# Altium PCB 3043-1-1552.PcbDoc
Units mm, origin at the board's own origin, x right, y up, seen from the top; angles counter-clockwise.
Board outline 79.04 x 44.02 mm, 2 copper layers (Top Layer, Bottom Layer); 59 components, 48 nets, 203 pads, 48 vias.
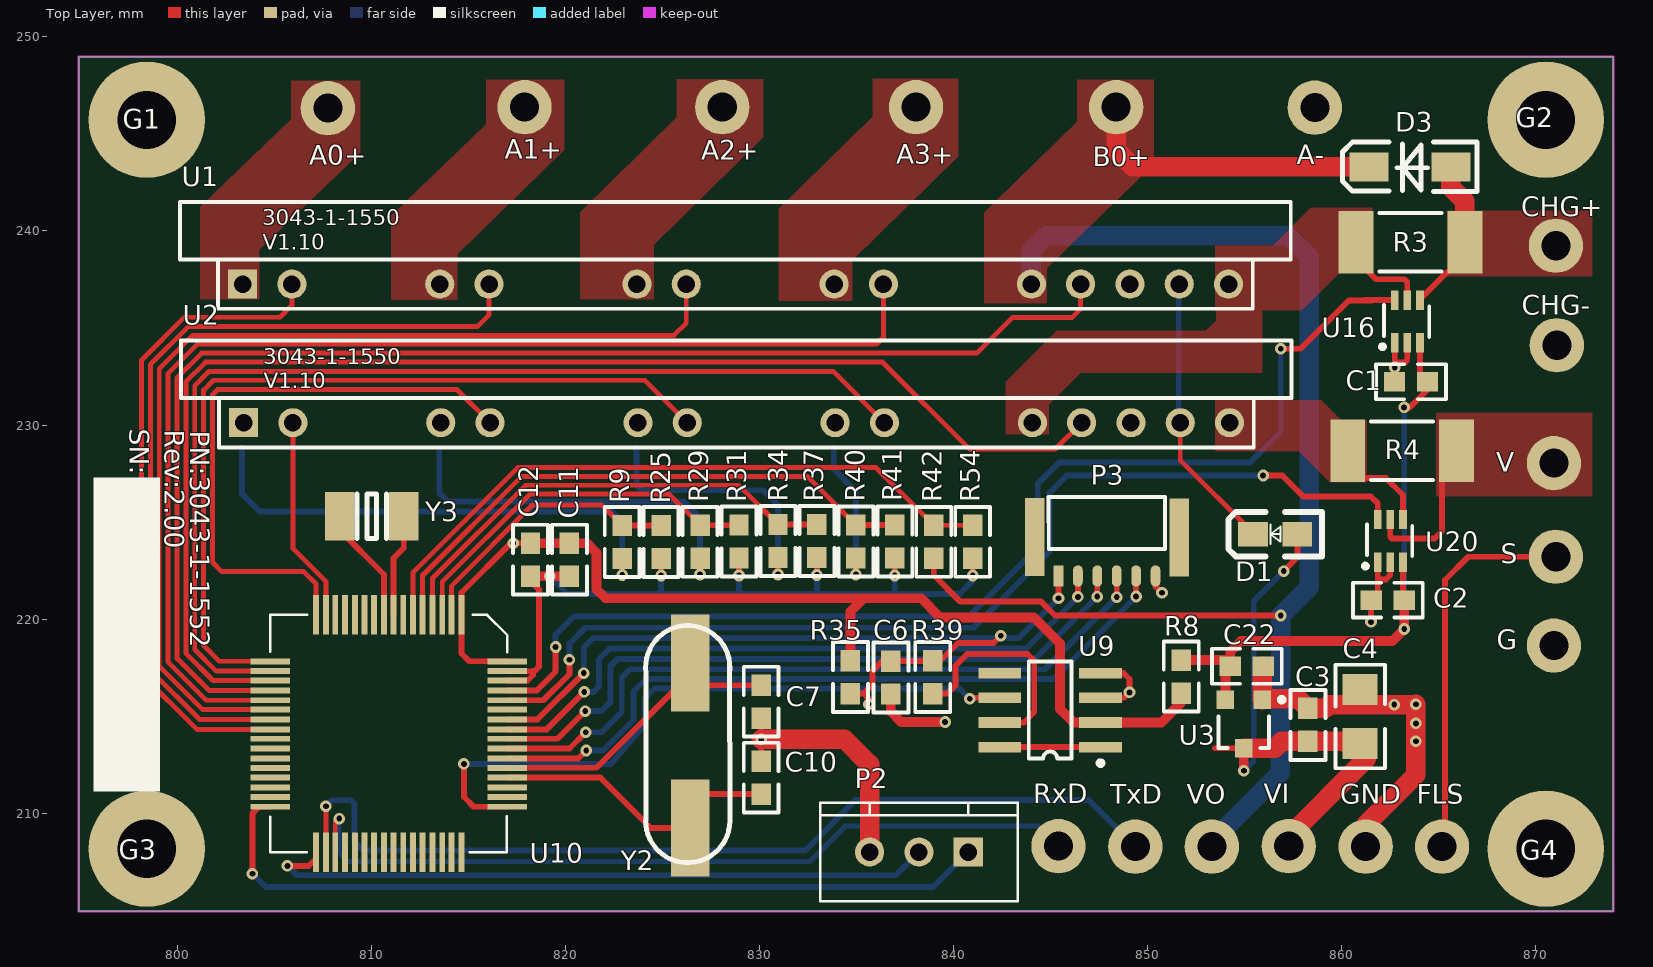
[diagram p0: Top Layer view]
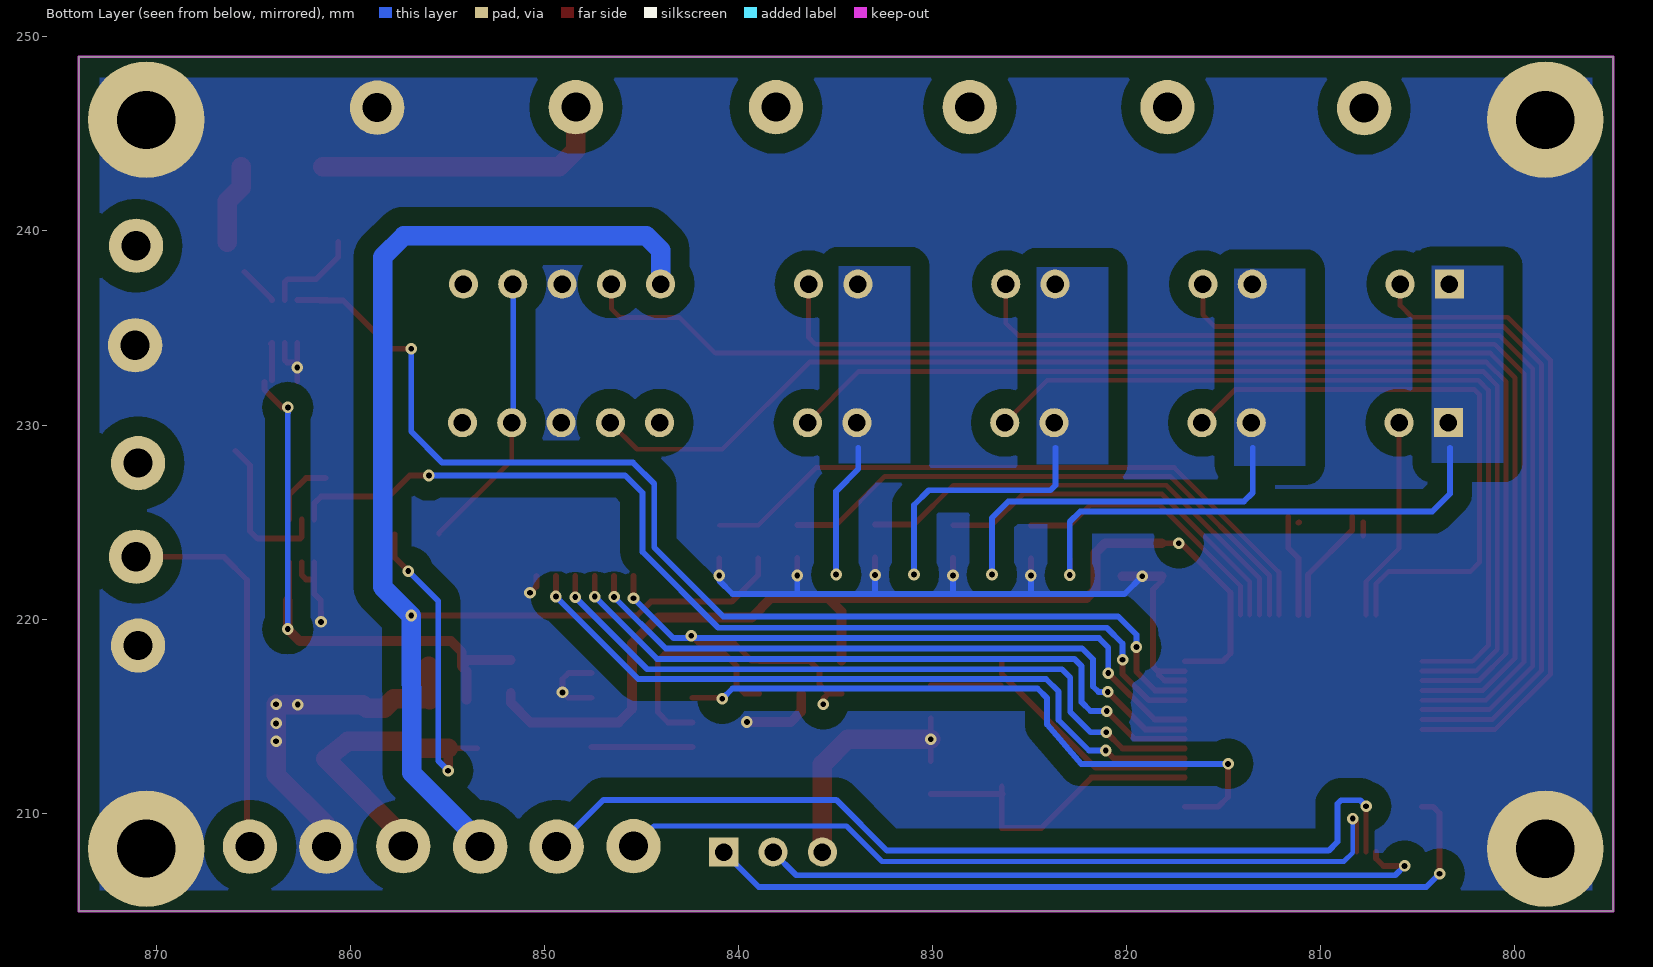
[diagram p1: Bottom Layer view, seen from below]

## Layer stack, top to bottom
Top Layer: signal copper 0.0356
Dielectric: core 0.32, FR-4, Dk 4.8
Bottom Layer: signal copper 0.0356

## Board outline
794.944,204.953 873.989,204.953 873.989,248.971 794.944,248.971

## Design rules (kind name [scope] priority, off if disabled: settings)
Clearance [All] p1: gap=0.1
ComponentClearance [All] p1: gap=0 collisioncheckmode=2
HoleSize [All] p1: absolutevalues=TRUE maxlimit=10 minlimit=0.025 maxpercent=80.000 minpercent=20.000
PolygonConnect [All] p1: connectstyle=Direct reliefconductorwidth=0.254 reliefentries=4 polygonreliefangle="90 Angle"
RoutingVias [All] p1: holewidth=0.711 width=1.27 viastyle="Through Hole" minholewidth=0.711 minwidth=1.27 maxholewidth=0.711 maxwidth=1.27
SolderMaskExpansion [All] p1: expansion=0.102
TestPointUsage [All] p1: valid=0 allowmultiple=FALSE
Testpoint [All] p1: side=15 testpointundercomponent=TRUE minsize=1.016 maxsize=2.54 preferedsize=1.524 minholesize=0 maxholesize=1.016 preferedholesize=0.813 testpointgrid=0.025 style=1023 order=-539222988
Width [All] p1: maxlimit=10 minlimit=0.1 preferedwidth=0.254 toplayer_prefwidth=1 bottomlayer_prefwidth=1 minimp=50.000000 maximp=50.000000 favimp=50.000000
16 further rules are at their usual default settings.

## Classes and differential pairs
component class U_2-Charge&Discharge: A0+ A1+ A2+ A3+ A- B0+ C1 C2 CHG+ CHG- D3 G R3 R4 S SEN U1 U2 U16 U20 V
component class U_1-Power: 5V -5V BAT C3 C4 C22 D1 DS1 G1 G2 G3 G4 J1 J2 J3 J4 NC R8 R46 R94 R95 R96 R97 R98 R99 R100 R101 R102 TP11 U3 U32 U63 U64 U65 U66 U67 U68 U69 VIN VMNG VOUT
component class U_5-ADC: R9 R25 R29 R31 R34 R37 R40 R41 R42 R54

## Components (designator, comment, footprint, x,y, rotation, side; value= is the part's Value field where it differs from the comment)
A0+ "ND" END_1.5_2.8 807.771,246.329 r0 top
A1+ "ND" END_1.5_2.8 817.905,246.38 r0 top
A2+ "ND" END_1.5_2.8 828.091,246.38 r0 top
A3+ "ND" END_1.5_2.8 838.073,246.38 r0 top
A- "ND" END_1.5_2.8 858.622,246.355 r0 top
B0+ "ND" END_1.5_2.8 848.385,246.38 r0 top (schematic designator B+)
C1 "100nF_20%_0603" C1608-0603 863.575,232.232 r0 top
C2 "100nF_20%_0603" C1608-0603 862.381,220.98 r0 top
C3 "4.7uF_20%_0603" C1608-0603 858.266,214.554 r90 top
C4 "4.7uF_20%_0603" CC3216-1206 860.958,216.129 r90 top
C6 "100nF_20%_0603" C1608-0603 836.778,216.992 r270 top
C7 "22pF_20%_0603" C1608-0603 830.097,215.748 r90 top
C10 "22pF_20%_0603" C1608-0603 830.097,211.836 r270 top
C11 "100nF_20%_0603" C1608-0603 820.217,223.063 r270 top
C12 "100nF_20%_0603" C1608-0603 818.21,223.063 r270 top
C22 "4.7uF_20%_0603" C1608-0603 855.116,217.576 r0 top
CHG+ "ND" END_1.5_2.8 871.042,239.243 r0 top
CHG- "ND" END_1.5_2.8 871.093,234.112 r0 top
D1 "SS14" LED0805 856.463,224.384 r0 top
D3 "SS14" DO-214AB_SS14 866.724,242.037 r180 top
FLS "ND" END_1.5_2.8 865.175,208.28 r0 top
G "ND" END_1.5_2.8 870.941,218.643 r90 top
G1 "ND" END_3_6 798.441,245.724 r0 top
G2 "ND" END_3_6 870.517,245.724 r0 top
G3 "ND" END_3_6 798.441,208.174 r0 top
G4 "ND" END_3_6 870.517,208.18 r0 top
GND "ND" END_1.5_2.8 861.238,208.28 r0 top
P2 "Header 3" XH-03H 840.765,208.001 r180 top
P3 "Header 6" SH-06S 845.439,222.25 r0 top
R3 "25mR_1%_3225" CR6332-2512 863.549,239.42 r180 top
R4 "25mR_1%_3225" CR6332-2512 863.117,228.676 r180 top
R8 "0R_1%_0603" C1608-0603 851.738,217.043 r90 top
R9 "1K_5%_0603" C1608-0603 822.935,223.977 r90 top
R25 "1K_5%_0603" C1608-0603 824.941,223.977 r90 top
R29 "1K_5%_0603" C1608-0603 826.948,223.989 r90 top
R31 "1K_5%_0603" C1608-0603 828.954,224.003 r90 top
R34 "1K_5%_0603" C1608-0603 830.961,224.028 r90 top
R35 "10K _5%_0603" C1608-0603 834.695,217.018 r90 top
R37 "1K_5%_0603" C1608-0603 832.968,224.028 r90 top
R39 "0R _5%_0603" C1608-0603 838.937,217.018 r90 top
R40 "1K_5%_0603" C1608-0603 834.974,224.003 r90 top
R41 "1K_5%_0603" C1608-0603 836.981,224.003 r90 top
R42 "1K_5%_0603" C1608-0603 838.987,223.989 r90 top
R54 "1K_5%_0603" C1608-0603 840.994,223.989 r90 top
RxD "ND" END_1.5_2.8 845.414,208.305 r0 top
S "ND" END_1.5_2.8 871.042,223.215 r90 top
TxD "ND" END_1.5_2.8 849.376,208.28 r0 top
U1 "3043-1-1550" 3043-1-1550_V1.10 823.646,237.287 r0 top
U2 "3043-1-1550" 3043-1-1550_V1.10 823.697,230.149 r0 top
U3 "XC6206" SO-G3/C2.5 854.913,213.69 r180 top
U9 "MAX706S" SO-8 844.982,215.316 r90 top
U10 "MSP430F149/249/449" QFP-64 816.991,207.975 r180 top
U16 "INA213" SC70-6 862.736,234.239 r90 top
U20 "INA213" SC70-6 861.859,222.936 r90 top
V "ND" END_1.5_2.8 870.941,228.041 r180 top
VI "ND" END_1.5_2.8 857.275,208.305 r0 top
VO "ND" END_1.5_2.8 853.313,208.28 r0 top
Y2 "8MHz_SMD" XTAL-P4mm_SMD 825.678,212.039 r90 top
Y3 "32.768kHz_SMD" XTAL-3216 811.682,225.298 r180 top

## Footprints (in the part's own frame and the unit in brackets; to place one, negate y for a bottom-side part, rotate by r counter-clockwise, add the part's x,y. Pads: shape width x height; smd on the part's side, far side on the other; paste and mask are expansions set on the pad)
3043-1-1550_V1.10 [mm]
  rect 1.5x1.5 hole 0.9: 1(-20.269,-0.025)
  round 1.5 hole 0.9: 2(-17.729,-0.025) 5(-10.109,-0.025) 6(-7.569,-0.025) 9(0.051,-0.025) 10(2.591,-0.025) 13(10.211,-0.025) 14(12.751,-0.025) 17(20.371,-0.025) 18(22.911,-0.025) 19(25.451,-0.025) 20(27.991,-0.025) 21(30.531,-0.025)
  silkscreen extent -23.49,-1.3 33.73,4.22
C1608-0603 [mm] "Chip Resistor; Body 1.6 x 0.8 mm (LxW typ)"
  rect 1.1x1 smd: 1(-0.85,0) 2(0.85,0)
  silkscreen extent -1.8,-0.9 1.8,0.9
CC3216-1206 [mm]
  rect 1.6x1.8 smd: 1(-2.54,0) 2(0.26,0)
  silkscreen extent -3.81,-1.27 1.52,1.27
CR6332-2512 [mm] "Chip Resistor; Body 6.3 x 3.2 mm (LxW typ)"
  rect 1.8x3.2 smd: 1(-2.8,0) 2(2.8,0)
  silkscreen extent -1.6,-1.5 1.6,1.5
DO-214AB_SS14 [mm]
  rect 2x1.5 smd: 1(1.092,-1.27) 2(5.309,-1.27)
  silkscreen extent -0.25,-2.54 6.68,0
END_1.5_2.8 [mm]
  round 2.8 hole 1.5: 1(0,0)
END_3_6 [mm]
  round 6 hole 3: 1(0,0)
LED0805 [mil]
  rect 60x50 smd: 1(49.55,-0.2) 2(-40.45,-0.2)
  silkscreen extent -90,-45 100,45
QFP-64 [mil]
  rect 12x80 smd: 1(92,-482) 2(112,-482) 3(131,-482) 4(151,-482) 5(171,-482) 6(190,-482) 7(210,-482) 8(230,-482) 9(249,-482) 10(269,-482) 11(289,-482) 12(308,-482) 13(328,-482) 14(348,-482) 15(367,-482) 16(387,-482) 33(387,-1) 34(367,-1) 35(348,-1) 36(328,-1) 37(308,-1) 38(289,-1) 39(269,-1) 40(249,-1) 41(230,-1) 42(210,-1) 43(190,-1) 44(171,-1) 45(151,-1) 46(131,-1) 47(112,-1) 48(92,-1)
  rect 80x12 smd: 17(480,-388) 18(480,-368) 19(480,-349) 20(480,-329) 21(480,-309) 22(480,-290) 23(480,-270) 24(480,-250) 25(480,-231) 26(480,-211) 27(480,-191) 28(480,-172) 29(480,-152) 30(480,-132) 31(480,-113) 32(480,-93) 49(-1,-93) 50(-1,-113) 51(-1,-132) 52(-1,-152) 53(-1,-172) 54(-1,-191) 55(-1,-211) 56(-1,-231) 57(-1,-250) 58(-1,-270) 59(-1,-290) 60(-1,-309) 61(-1,-329) 62(-1,-349) 63(-1,-368) 64(-1,-388)
  silkscreen extent -1,-482 480,-1
SC70-6 [mm]
  rect 1x0.4 smd: 1(0,0) 2(0,-0.65) 3(0,-1.3) 4(2.2,-1.3) 5(2.2,-0.65) 6(2.2,0)
  silkscreen extent -0.3,-1.78 1.96,0.73
SH-06S [mm]
  rect 1x4 smd: 0(-1.245,1.981) 0(6.198,1.956)
  rect 0.5x1.1 smd: 1(-0.025,-0.025)
  oval 0.5x1.1 smd: 2(0.975,-0.025) 3(1.975,-0.025) 4(2.975,-0.025) 5(3.975,-0.025) 6(4.975,-0.025)
  silkscreen extent -0.53,1.36 5.47,4.04
SO-8 [mm] "Plastic Small Outline; 8 Leads; Body Width 3.9 mm"
  rect 0.55x2.2 smd: 1(-1.905,-2.6) 2(-0.635,-2.6) 3(0.635,-2.6) 4(1.905,-2.6) 5(1.905,2.6) 6(0.635,2.6) 7(-0.635,2.6) 8(-1.905,2.6)
  silkscreen extent -2.85,-2.72 2.5,1.1
SO-G3/C2.5 [mm] "SOT-23; 3 Leads; Body 3.0 x 2.6 mm, inc. leads (LxW max)"
  rect 0.9x0.95 smd: 1(-1.001,-2.164) 2(0.899,-2.164) 3(-0.051,0.336)
  silkscreen extent -2.13,-2.29 1.25,0.34
XH-03H [mm] "XH Serial,2.54mm pitch"
  rect 1.5x1.5 hole 0.9: 1(0,0)
  round 1.5 hole 0.9: 2(2.54,0) 3(5.08,0)
  silkscreen extent -2.54,-2.54 7.62,2.54
XTAL-3216 [mil] "XTAL SMD type, body=1.5x3.2mm"
  rect 60x98.43 smd: 1(0,0) 2(130,0)
  silkscreen extent 35,-45 95,45
XTAL-P4mm_SMD [mm] "XTAL,Pitch 4mm,SMD"
  rect 5x2 smd: 1(-2.794,-0.762) 2(5.715,-0.762)
  silkscreen extent -4.58,-2.81 7.63,1.54

## Part data
C1 C2 C3 C4 C6 C7 C10 C11 C12 C22: library part Cap2, "Capacitor"
D1: library part "D Schottky", "Schottky Diode"
D3: library part "D Tunnel1", "Tunnel Diode - RLC Model"
P2: "Header, 3-Pin"
P3: library part "Header 3X2", "Header, 3-Pin, Dual row"
R3 R4 R8 R9 R25 R29 R31 R34 R35 R37 R39 R40 R41 R42 R54: library part Res3, "Resistor"
U9: library part PCF8574T
U10: library part STC15F2K60S2_QFP44
Y2 Y3: library part XTAL, "Crystal Oscillator"

## Via types
v1: diameter 0.6, hole 0.3, Top Layer to Bottom Layer, 48 vias

## Nets (pads, with @x,y where several pads share a name; then routed paths per layer and width w, separated by ;. In a path a pad name is that pad's centre, name@x,y a point inside that pad or via, vN(x,y) a via of type N, cw(c..) or ccw(c..) an arc to the next point about the centre after c; other vN are vias at no path point)
A_VB0: R9.2 R25.2 U10.2 | length 14.5
  Top Layer w0.25: U10.2 814.146,221.717 818.312,225.882 821.88,225.882 R9.2
  Top Layer w0.3: R9.2 R25.2
A_VB1: R29.2 R31.2 U10.3 | length 19.5
  Top Layer w0.25: U10.3 813.664,221.92 818.185,226.441 825.346,226.441 R29.2
  Top Layer w0.3: R29.2 R31.2@828.941,224.839
A_VB2: R34.2 R37.2 U10.4 | length 24.5
  Top Layer w0.25: U10.4 813.156,222.098 817.956,226.898 828.941,226.898 R34.2
  Top Layer w0.3: R34.2 R37.2
A_VB3: R40.2 R41.2 U10.5 | length 29.5
  Top Layer w0.25: U10.5 812.648,222.25 817.753,227.355 832.471,227.355 R40.2
  Top Layer w0.3: R40.2 R41.2
A_VBAK: R42.2 R54.2 U10.6 | length 34.5
  Top Layer w0.25: U10.6 812.165,222.428 817.55,227.813 836.014,227.813 R42.2 R54.2
A_VCHG: U10.61 U16.6 | length 60
  Top Layer w0.3: U10.61 818.54,216.332 819.506,217.297 v1(819.506,218.567) ; v1(856.869,233.934) 857.885,233.934 860.374,236.423 861.568,236.423 ; 861.187,236.449 861.568,236.446 U16.6
  Bottom Layer w0.3: v1(819.506,218.567) 819.506,219.202 820.445,220.142 840.791,220.142 844.347,223.698 844.347,226.974 845.439,228.067 855.269,228.067 856.869,229.667 v1(856.869,233.934)
A_VDIS: U10.60 U20.6 | length 53.8
  Top Layer w0.3: U10.60 818.871,215.824 820.217,217.17 v1(820.217,217.907) ; v1(855.955,227.406) 856.945,227.406 858.037,226.314 861.517,226.314 861.859,225.972 U20.6
  Bottom Layer w0.3: v1(820.217,217.907) 820.217,218.745 821.03,219.558 841.045,219.558 844.956,223.469 844.956,226.517 845.845,227.406 v1(855.955,227.406)
CHG_0: U1.2 U10.24 | length 34
  Top Layer w0.25: U10.24 801.014,214.325 798.17,217.17 798.17,233.35 800.379,235.56 805.307,235.56 805.917,236.169 U1.2
CHG_1: U1.6 U10.23 | length 43.1
  Top Layer w0.25: U10.23 801.167,214.833 798.627,217.373 798.627,233.121 800.583,235.077 815.467,235.077 816.077,235.687 U1.6
CHG_2: U1.10 U10.22 | length 52.1
  Top Layer w0.25: U10.22 801.319,215.341 799.084,217.576 799.084,232.893 800.811,234.62 825.602,234.62 826.237,235.255 U1.10
CHG_3: U1.14 U10.21 | length 61.3
  Top Layer w0.25: U10.21 801.497,215.824 799.541,217.78 799.541,232.664 801.04,234.163 836.041,234.163 836.397,234.518 U1.14
CHG_4: U1.18 U10.20 | length 69.2
  Top Layer w0.25: U10.20 801.649,216.332 799.998,217.983 799.998,232.435 801.268,233.705 841.206,233.705 843.051,235.551 846.116,235.551 846.557,235.991 U1.18
DCHG_0: U2.2 U10.15 | length 10.6
  Top Layer w0.25: U2.2 805.967,223.647 807.669,221.945 U10.15
DCHG_1: U2.6 U10.16 | length 31.1
  Top Layer w0.25: U10.16 807.161,221.817 806.525,222.453 802.31,222.453 801.827,222.936 801.827,231.572 802.089,231.833 814.418,231.833 U2.6
DCHG_2: U2.10 U10.17 | length 43
  Top Layer w0.25: U10.17 802.183,217.83 801.37,218.643 801.37,231.8 801.878,232.308 824.103,232.308 U2.10
DCHG_3: U2.14 U10.18 | length 54.9
  Top Layer w0.25: U10.18 802.03,217.322 800.913,218.44 800.913,232.029 801.649,232.766 833.806,232.766 U2.14
DCHG_4: U2.18 U10.19 | length 67.9
  Top Layer w0.25: U10.19 801.853,216.84 800.456,218.237 800.456,232.232 801.472,233.248 836.346,233.248 840.842,228.752 845.236,228.752 U2.18
FLS: FLS.1 S.1 | length 20
  Top Layer w0.3: FLS.1 865.327,208.432 865.327,222.021 866.521,223.215 S.1
GND: A-.1 C1.1 C2.1 C3.2 C4.2 C6.2 C7.1 C10.1 C11.2 C12.2 C22.2 CHG-.1 G1.1 G2.1 G3.1 G4.1 G.1 GND.1 P2.3 P3.6 R25.1 R31.1 R37.1 R41.1 R54.1 U1.19 U2.19 U3.1 U9.3 U9.4 U10.62 U10.63 U16.1 U16.2 U20.1 U20.2 | length 89.2
  Top Layer w0.3: U10.62 818.058,216.84 818.337,217.119 818.337,217.348 818.439,217.348 818.642,217.551 818.642,221.539 818.21,221.971 C12.2 ; U10.63 818.312,217.322 818.337,217.332 818.342,217.334 818.377,217.348 ; v1@819.048,222.326 v1@819.099,222.377 ; v1(824.941,222.25) R25.1 ; v1(828.954,222.25) R31.1 ; C10.1 C7.1 ; v1(832.968,222.275) R37.1 ; v1(836.981,222.25) R41.1 ; v1(840.994,222.25) R54.1 ; U9.3 848.792,215.951 v1(849.071,216.23) 849.071,216.916 848.766,217.221 U9.4 ; P3.6 850.414,221.691 v1(850.744,221.361) ; v1(861.517,219.862) C2.1 861.859,221.308 U20.1 ; 861.873,222.047 862.279,222.047 862.509,222.277 U20.2 ; C1.1@862.736,232.269 U16.1 ; v1@862.736,233.223 863.27,233.223 863.386,233.339 U16.2
  Top Layer w0.5: C12.2 C11.2 ; C6.2 836.778,215.24 837.311,214.706 v1(839.572,214.706) ; U3.1 U3.1@855.966,215.855
  Top Layer w1: v1(830.097,213.817) 834.39,213.817 835.685,212.522 P2.3 ; U3.1 855.914,217.524 C22.2 ; U3.1@855.966,215.907 857.763,215.907 C3.2 859.167,215.404 859.364,215.601 v1@863.555,215.601 ; GND.1 861.238,209.398 863.829,211.988 v1(863.829,215.621)
  Bottom Layer w0.3: v1(819.201,222.213) 820.112,221.302 840.31,221.302 840.994,221.985 v1(840.994,222.25) ; 824.941,221.302 v1(824.941,222.25) ; 828.954,221.353 v1(828.954,222.25) ; 832.968,221.302 v1(832.968,222.275) ; 836.981,221.353 v1(836.981,222.25)
  other v1: 863.829,213.716 863.829,214.63 862.711,215.601 862.736,232.969
MCU_RXD: P2.2 U10.33 | length 35.2
  Top Layer w0.3: v1(805.688,207.289) 806.78,207.289 807.161,207.67 U10.33
  Bottom Layer w0.3: v1(805.688,207.289) 806.171,206.807 837.032,206.807 P2.2
MCU_RXD2_2: RxD.1 U10.35 | length 42
  Top Layer w0.25: U10.35 808.152,209.55 v1(808.355,209.728)
  Bottom Layer w0.25: v1(808.355,209.728) 808.355,207.975 808.812,207.518 832.612,207.518 834.441,209.347 844.372,209.347 RxD.1
MCU_TXD: P2.1 U10.32 | length 42.1
  Top Layer w0.3: v1(803.885,206.883) 803.885,210.007 804.215,210.337 U10.32
  Bottom Layer w0.3: v1(803.885,206.883) 804.57,206.197 838.962,206.197 P2.1
MCU_TXD2_2: TxD.1 U10.34 | length 48.5
  Top Layer w0.25: U10.34 v1(807.669,210.363)
  Bottom Layer w0.3: v1(807.669,210.363) 807.974,210.668 808.965,210.668 809.142,210.49 809.142,208.534 809.6,208.077 832.358,208.077 834.974,210.693 846.963,210.693 TxD.1
NetC7_2: C7.2 U10.53 Y2.2 | length 15.6
  Top Layer w0.3: U10.53 821.614,212.344 826.44,217.17 Y2.2 ; Y2.2@826.504,216.598 C7.2
NetC10_2: C10.2 U10.52 Y2.1 | length 16.3
  Top Layer w0.3: U10.52 821.817,211.836 824.408,209.245 Y2.1 Y2.1@826.44,211.379 ; Y2.1@826.403,210.986 C10.2
NetR39_1: R39.1 U9.7 | length 11.5
  Top Layer w0.3: R39.1 839.687,216.168 840.105,216.586 840.105,217.602 840.715,218.211 843.813,218.211 844.169,217.856 844.169,215.214 843.636,214.681 U9.7
NetU9_1: U9.1 U9.8 | length 5.2
  Top Layer w0.3: U9.8 U9.1
NetU10_8: U10.8 Y3.1 | length 5.3
  Top Layer w0.3: Y3.1@811.124,224.993 Y3.1@811.149,224.968 ; U10.8 811.149,223.139 811.682,223.672 Y3.1
NetU10_9: U10.9 Y3.2 | length 6.7
  Top Layer w0.3: Y3.2@807.822,224.307 Y3.2@807.822,224.993 ; Y3.2 808.38,224.587 810.666,222.301 U10.9
NRST: C6.1 P3.1 R35.1 R39.2 U10.58 | length 43
  Top Layer w0.3: U10.58 818.566,214.833 v1(820.953,217.221) ; R35.1 835.369,216.168 ; v1(835.635,215.621) 835.635,215.902 835.369,216.168 ; R39.2@838.911,217.842 836.332,217.842 835.838,217.348 835.838,216.637 835.369,216.168 ; R39.2 839.329,217.868 840.232,218.77 842.061,218.77 v1(842.442,219.151) ; v1(845.414,221.082) P3.1
  Bottom Layer w0.3: v1(820.953,217.221) 820.953,218.542 821.436,219.024 843.356,219.024 v1(845.414,221.082) ; v1@842.442,219.024 v1(842.442,219.151)
TCK: P3.2 U10.57 | length 34.1
  Top Layer w0.3: U10.57 819.048,214.325 v1(820.979,216.256) ; v1(846.414,221.148) P3.2
  Bottom Layer w0.3: v1(820.979,216.256) 821.461,216.256 821.741,216.535 821.741,217.932 822.3,218.491 843.756,218.491 v1(846.414,221.148)
TDI: P3.4 U10.55 | length 36.8
  Top Layer w0.3: U10.55 820.217,213.335 v1(821.055,214.173) ; v1(848.414,221.135) P3.4
  Bottom Layer w0.3: v1(821.055,214.173) 821.868,214.173 822.909,215.214 822.909,216.992 823.341,217.424 844.702,217.424 v1(848.414,221.135)
TDO: P3.5 U10.54 | length 37.8
  Top Layer w0.3: U10.54 820.674,212.827 v1(821.08,213.233) ; v1(849.414,221.171) P3.5
  Bottom Layer w0.3: v1(821.08,213.233) 821.944,213.233 823.519,214.808 823.519,216.281 824.162,216.924 845.167,216.924 v1(849.414,221.171)
TMS: P3.3 U10.56 | length 35.6
  Top Layer w0.3: U10.56 819.607,213.843 v1(821.03,215.265) ; v1(847.414,221.164) P3.3
  Bottom Layer w0.3: v1(821.03,215.265) 821.868,215.265 822.325,215.722 822.325,217.576 822.706,217.957 844.207,217.957 v1(847.414,221.164)
V_BAK: B0+.1 D3.2 R42.1 U1.17 VO.1 | length 85
  Top Layer w0.3: R42.1 838.987,222.275 840.359,220.904 844.525,220.904 845.236,220.193 v1(856.869,220.193)
  Top Layer w1: B0+.1 848.385,244.17 849.249,243.307 D3.2
  Bottom Layer w1: U1.17 844.017,239.014 844.753,239.751 857.25,239.751 858.342,238.658 858.342,221.666 v1(856.869,220.193) 856.845,212.903 856.844,212.42 ; VO.1 853.313,208.559 856.844,212.09 856.844,212.903
V_BT0: A0+.1 R9.1 U1.1 U2.1 | length 26.1
  Top Layer w0.3: v1(822.935,222.275) R9.1
  Bottom Layer w0.3: 803.351,228.829 803.351,226.466 804.266,225.552 822.401,225.552 822.935,225.019 v1(822.935,222.275)
V_BT1: A1+.1 R29.1 U1.5 U2.5 | length 20
  Top Layer w0.3: v1(826.948,222.301) R29.1
  Bottom Layer w0.3: 813.511,228.829 813.511,226.517 813.968,226.06 826.11,226.06 826.948,225.222 v1(826.948,222.301)
V_BT2: A2+.1 R34.1 U1.9 U2.9 | length 14.1
  Top Layer w0.3: v1(830.961,222.301) R34.1
  Bottom Layer w0.3: 823.671,228.829 823.671,226.898 823.925,226.644 830.199,226.644 830.961,225.882 v1(830.961,222.301)
V_BT3: A3+.1 R40.1 U1.13 U2.13 | length 7.9
  Top Layer w0.3: v1(834.974,222.301) R40.1
  Bottom Layer w0.3: 833.831,228.829 833.831,227.736 834.974,226.593 v1(834.974,222.301)
V_CHG: R3.2 U1.21 U2.17 U16.5 | length 5
  Top Layer w0.3: R3.2@860.622,239.446 860.622,238.664 861.771,237.515 863.244,237.515 863.386,237.373 863.386,236.891 U16.5
V_DISCHG: R4.2 U2.21 U20.4 | length 3.5
  Top Layer w0.3: 861.289,227.279 862.279,227.279 863.159,226.399 U20.4
VCC_2V8: C1.2 C2.2 C22.1 R8.2 U3.2 U16.3 U20.3 | length 33.5
  Top Layer w0.3: C2.2@863.159,221.052 U20.3 ; v1(863.219,230.911) 863.51,230.911 864.425,231.826 C1.2 ; C1.2@864.036,232.316 U16.3 U16.3@864.083,234.193
  Top Layer w0.5: R8.2 853.95,217.893 C22.1 ; U3.2 854.014,217.324 C22.1 ; C2.2 v1(863.231,219.493) 862.609,218.872 854.812,218.872 854.266,218.327 C22.1
  Bottom Layer w0.3: v1(863.219,230.911) 863.231,230.212 v1(863.231,219.493)
VCC_5V: C3.1 C4.1 D1.1 U3.3 VI.1 | length 28.9
  Top Layer w0.3: 853.471,213.355 U3.3 ; v1(857.021,222.479) 857.721,223.178 D1.1
  Top Layer w0.5: v1(854.964,212.192) U3.3
  Top Layer w1: U3.3 856.559,213.355 856.908,213.704 860.132,213.704 861.263,212.801 857.275,208.813 VI.1
  Bottom Layer w0.3: v1(854.964,212.192) 855.477,212.705 855.477,220.935 v1(857.021,222.479)
VCC_CHARGE: CHG+.1 D3.1 R3.1 U16.4 | length 6.2
  Top Layer w0.3: U16.4 864.036,236.479 R3.1@865.454,237.896
  Top Layer w1: D3.1 865.632,242.24 866.349,241.523 R3.1
VCC_DIS: R4.1 U20.5 V.1 | length 8.2
  Top Layer w0.3: U20.5 862.509,224.23 862.584,224.155 864.794,224.155 865.175,224.536 865.175,227.934 R4.1
VCC_MCU: C11.1 C12.1 R8.1 R35.2 U9.2 U10.1 U10.64 | length 56.2
  Top Layer w0.3: U10.64 815.061,217.83 814.654,218.237 814.654,221.373 v1@817.194,223.913 ; v1(817.321,223.913) C12.1 ; R35.2 834.695,219.1
  Top Layer w0.5: C12.1 C11.1 821.119,223.913 821.614,223.418 821.614,221.539 822.071,221.082 838.327,221.082 839.318,220.091 844.144,220.091 845.49,218.745 845.49,215.367 846.176,214.681 850.722,214.681 851.738,215.697 R8.1 ; R35.2 834.695,220.396 835.381,221.082
VCC_TH: D1.2 U1.20 U2.20 | length 14.3
  Top Layer w0.25: U2.20 851.687,228.194 855.435,224.446 D1.2
  Bottom Layer w0.3: U1.20@851.611,237.134 851.611,230.2 U2.20
WDT: U9.6 U10.49 | length 34.4
  Top Layer w0.3: v1(814.781,212.547) 814.781,210.845 815.289,210.337 U10.49 ; v1@840.842,215.951 U9.6
  Bottom Layer w0.3: v1(814.781,212.547) 822.35,212.547 824.103,214.579 824.103,215.925 824.602,216.424 840.318,216.424 v1(840.842,215.9)
pads on no net: P3.0 U9.5 U10.7 U10.10 U10.11 U10.12 U10.13 U10.14 U10.25 U10.26 U10.27 U10.28 U10.29 U10.30 U10.31 U10.36 U10.37 U10.38 U10.39 U10.40 U10.41 U10.42 U10.43 U10.44 U10.45 U10.46 U10.47 U10.48 U10.50 U10.51 U10.59

## Polygon pours and split planes (outlines as drawn)
V_CHG on Top Layer (solid, remove dead copper): 842.747,229.54 844.906,229.54 844.906,231.038 845.617,231.75 846.557,232.689 855.904,232.689 855.904,236.271 853.542,236.271 853.542,235.382 853.008,234.848 845.312,234.848 842.696,232.232 842.696,229.565
V_BAK on Top Layer (solid, remove dead copper): 844.804,236.32 844.804,238.077 850.316,243.447 850.316,247.802 846.379,247.802 846.379,245.625 842.112,241.467 841.578,240.948 841.578,236.271 844.753,236.271
V_BT3 on Top Layer (solid, remove dead copper): 834.796,236.296 834.796,238.493 840.257,243.859 840.257,247.853 835.838,247.853 835.838,245.881 831.012,241.139 831.012,236.396 834.796,236.396
V_BT2 on Top Layer (solid, remove dead copper): 824.56,236.549 824.56,239.294 830.199,244.833 830.199,247.828 825.754,247.828 825.754,245.856 820.776,240.966 820.776,236.474 824.56,236.474
V_BT1 on Top Layer (solid, remove dead copper): 814.426,236.449 814.426,238.813 819.963,244.182 819.963,247.802 815.924,247.802 815.924,245.512 811.047,240.783 811.047,236.449
V_BT0 on Top Layer (solid, remove dead copper): 804.24,236.118 804.24,239.045 808.939,243.557 809.447,244.045 809.447,247.752 805.891,247.752 805.891,245.752 801.192,241.24 801.192,236.484 804.24,236.484
V_DISCHG on Top Layer (solid, remove dead copper): 853.567,228.651 857.783,228.651 859.384,227.051 861.289,227.051 861.289,230.251 859.993,230.251 858.952,231.292 853.491,231.292 853.491,228.625
VCC_CHARGE on Top Layer (solid, remove dead copper): 865.454,241.046 872.922,241.046 872.922,237.668 865.454,237.668
V_CHG on Top Layer (solid, remove dead copper): 853.669,235.915 857.961,235.915 859.892,237.846 861.568,237.846 861.568,241.198 858.418,241.198 856.463,239.243 853.491,239.243 853.491,235.915
VCC_DIS on Top Layer (solid, remove dead copper): 864.919,230.632 872.922,230.632 872.922,226.339 864.87,226.339 864.87,230.657
GND on Bottom Layer (solid, remove dead copper): 794.868,248.945 873.912,248.945 873.912,204.826 794.868,204.826
V_BT0 on Bottom Layer (solid, remove dead copper): 800.811,238.201 804.291,238.201 804.291,228.067 800.608,228.067 800.608,238.201
V_BT1 on Bottom Layer (solid, remove dead copper): 810.997,238.049 814.476,238.049 814.476,227.914 810.793,227.914 810.793,238.049
V_BT2 on Bottom Layer (solid, remove dead copper): 821.157,238.125 824.636,238.125 824.636,227.99 820.953,227.99 820.953,238.125
V_BT3 on Bottom Layer (solid, remove dead copper): 831.367,238.176 834.847,238.176 834.847,228.041 831.164,228.041 831.164,238.176

## Keep-outs
Keep-Out Layer:
  the board outline again, w0.127

## Silkscreen, mask and mechanical layers (free items; w line width, h text height)
Top Overlay:
  region: 795.706,227.305 795.706,211.125 799.119,211.125 799.119,227.305
  text "SN:" at 797.56,229.819 h1 r270
  text "Rev:2.00" at 799.363,229.768 h1 r270
  text "PN:3043-1-1552" at 800.684,229.718 h1 r270

## Dimensions
794.944,248.971 to 873.938,248.971 on Top Overlay
873.938,248.971 to 874.166,204.978 on Top Overlay
798.441,245.724 to 870.517,245.724 on Top Overlay
798.441,245.724 to 798.441,208.174 on Top Overlay

## Text inside footprints (layer, text, board x,y; h text height)
U1: Top Overlay "V1.10" at 804.418,239.039 h0.8
U2: Top Overlay "V1.10" at 804.469,231.902 h0.8